# EAGLE board CT_schematic (EAGLE 7.6.0)

Size 100 x 80 mm. Coordinates in mm from the lower left corner, seen from the top.
Outline: 0,0 100,0 100,80 0,80 0,0
Copper layers (1*16): Top 0.035mm / dielectric 1.5mm / Bottom 0.035mm
Design rules "default": minimum track width 10mil, minimum drill 24mil, track to track 8mil, track to pad 8mil, pad to pad 8mil, via to via 8mil, smd to smd 8mil, copper to edge 40mil, drill to drill 8mil, minimum pad ring 10mil, minimum via ring 8mil, stop-mask expansion 4mil, vias tented up to drill 0mil, thermal gap 10mil

## Footprints (pad centres in the part's own frame; a part is rotated, then mirrored left to right if it is on the bottom)
C0603 = smd 0.8 x 0.8: 1 -0.762,0; 2 0.762,0
C0402 = smd 0.5 x 0.5: 1 -0.508,0; 2 0.508,0
C0805 = smd 1.2 x 1.3: 1 -1.016,0; 2 1.016,0
C1210 = smd 1.2 x 2.5: 1 -1.524,0; 2 1.524,0
EXV-9H = smd 3.505 x 1.676: 1 -2.857,0; 2 2.857,0
L0603 = smd 0.8 x 0.8: 1 -0.762,0; 2 0.762,0
L1210 = smd 1.2 x 2.5: 1 -1.524,0; 2 1.524,0
PJ-037B_PACKAGE = drill 3.7 square: 1 12,0 | drill 3.2 square: 2 6,0
R0603 = smd 0.8 x 0.8: 1 -0.762,0; 2 0.762,0
LQFP48 = smd 0.3 x 1.2: 1 -2.75,-4.25; 2 -2.25,-4.25; 3 -1.75,-4.25; 4 -1.25,-4.25; 5 -0.75,-4.25; 6 -0.25,-4.25; 7 0.25,-4.25; 8 0.75,-4.25; 9 1.25,-4.25; 10 1.75,-4.25; 11 2.25,-4.25; 12 2.75,-4.25; 25 2.75,4.25; 26 2.25,4.25; 27 1.75,4.25; 28 1.25,4.25; 29 0.75,4.25; 30 0.25,4.25; 31 -0.25,4.25; 32 -0.75,4.25; 33 -1.25,4.25; 34 -1.75,4.25; 35 -2.25,4.25; 36 -2.75,4.25 | smd 1.2 x 0.3: 13 4.25,-2.75; 14 4.25,-2.25; 15 4.25,-1.75; 16 4.25,-1.25; 17 4.25,-0.75; 18 4.25,-0.25; 19 4.25,0.25; 20 4.25,0.75; 21 4.25,1.25; 22 4.25,1.75; 23 4.25,2.25; 24 4.25,2.75; 37 -4.25,2.75; 38 -4.25,2.25; 39 -4.25,1.75; 40 -4.25,1.25; 41 -4.25,0.75; 42 -4.25,0.25; 43 -4.25,-0.25; 44 -4.25,-0.75; 45 -4.25,-1.25; 46 -4.25,-1.75; 47 -4.25,-2.25; 48 -4.25,-2.75
SSOP-20 = smd 1.651 x 0.432: 1 -3.48,2.925; 2 -3.48,2.275; 3 -3.48,1.625; 4 -3.48,0.975; 5 -3.48,0.325; 6 -3.48,-0.325; 7 -3.48,-0.975; 8 -3.48,-1.625; 9 -3.48,-2.275; 10 -3.48,-2.925; 11 3.48,-2.925; 12 3.48,-2.275; 13 3.48,-1.625; 14 3.48,-0.975; 15 3.48,-0.325; 16 3.48,0.325; 17 3.48,0.975; 18 3.48,1.625; 19 3.48,2.275; 20 3.48,2.925
182-009-MALE = drill 1.194 pad 1.524 octagon: 1 -5.537,10.923; 2 -2.769,10.923; 3 0,10.923; 4 2.769,10.923; 5 5.537,10.923; 6 -4.153,8.08; 7 -1.384,8.08; 8 1.384,8.08; 9 4.153,8.08 | hole 3.048: -12.446,9.501; 12.446,9.501
ABLS-25.000MHZ-B2F-T = smd 5.6 x 2.8: 1 -3.81,0; 2 5.69,0
ASEK = smd 1.4 x 1: 1 -1.1,-0.8; 2 1.1,-0.8; 3 1.1,0.8; 4 -1.1,0.8
SOIC-8_EP = smd 1.6 x 0.533: 1 -2.921,1.905; 2 -2.921,0.635; 3 -2.921,-0.635; 4 -2.921,-1.905; 5 2.921,-1.905; 6 2.921,-0.635; 7 2.921,0.635; 8 2.921,1.905 | smd 2.54 x 3.302: EPAD 0,0 | drill 0.406 pad 0.406: P$1 -0.508,0.635; P$2 0.381,0.635; P$3 -0.508,-0.635; P$4 0.381,-0.635
SON-6 = smd 0.55 x 0.3: 1 -0.355,0.5 | smd 0.52 x 0.3: 2 -0.37,0; 3 -0.37,-0.5; 4 0.37,-0.5; 5 0.37,0; 6 0.37,0.5
SW_4-1437565-2 = smd 1.4 x 2.1: 1 -2.23,4.55; 2 -2.23,-4.55; 3 2.23,4.55; 4 2.23,-4.55
LGM67K-G1J2-24-Z = smd 0.8 x 1.4: A -2,0; C 0,0
NC7SZ125M5X = smd 1.3 x 0.7: 1 -1.3,0.95; 2 -1.3,0; 3 -1.3,-0.95; 4 1.3,-0.95; 5 1.3,0.95

## Placement (x,y rotation side)
C1  1e-07  [C0603]  -48.26,58.42 0 top  (outside the outline)
C2  1e-07  [C0603]  -52.07,58.42 0 top  (outside the outline)
C3  1e-07  [C0603]  -55.88,58.42 0 top  (outside the outline)
C4  1e-07  [C0603]  -59.69,58.42 0 top  (outside the outline)
C5  4.7e-06  [C0603]  -44.45,58.42 0 top  (outside the outline)
C6  1e-08  [C0603]  -63.5,58.42 0 top  (outside the outline)
C7  1e-06  [C0603]  -15.24,63.5 0 top  (outside the outline)
C8  1e-11  [C0402]  -53.34,63.5 0 top  (outside the outline)
C9  1e-11  [C0402]  -57.15,63.5 0 top  (outside the outline)
C10  1e-06  [C0603]  -19.05,63.5 0 top  (outside the outline)
C11  1e-06  [C0603]  -22.86,63.5 0 top  (outside the outline)
C12  1e-06  [C0603]  -26.67,63.5 0 top  (outside the outline)
C13  4.7e-06  [C0805]  -40.64,52.07 0 top  (outside the outline)
C14  1e-08  [C0402]  -60.96,63.5 0 top  (outside the outline)
C15  1e-05  [C1210]  -58.42,45.72 0 top  (outside the outline)
C16  1e-05  [C1210]  -64.77,45.72 0 top  (outside the outline)
C17  1e-05  [C1210]  -16.51,52.07 0 top  (outside the outline)
C18  1e-05  [C1210]  -22.86,52.07 0 top  (outside the outline)
C19  1e-07  [C0402]  -64.77,63.5 0 top  (outside the outline)
C20  0.0001  [EXV-9H]  -38.1,38.1 0 top  (outside the outline)
C21  0.0001  [EXV-9H]  -49.53,38.1 0 top  (outside the outline)
C22  1e-08  [C0402]  -15.24,68.58 0 top  (outside the outline)
F1  240.0  [L0603]  -30.48,63.5 0 top  (outside the outline)
I1  1.5e-05  [L1210]  -29.21,52.07 0 top  (outside the outline)
J1  PJ-037B  [PJ-037B_PACKAGE]  -67.31,7.62 0 top  (outside the outline)
R1  10000.0  [R0603]  -25.4,58.42 0 top  (outside the outline)
R2  1000.0  [R0603]  -34.29,63.5 0 top  (outside the outline)
R3  1600.5  [R0603]  -38.1,63.5 0 top  (outside the outline)
R4  4700.0  [R0603]  -41.91,63.5 0 top  (outside the outline)
R5  10000.0  [R0603]  -30.48,58.42 0 top  (outside the outline)
R6  100000.0  [R0603]  -54.61,52.07 0 top  (outside the outline)
R7  100000.0  [R0603]  -59.69,52.07 0 top  (outside the outline)
R8  100000.0  [R0603]  -64.77,52.07 0 top  (outside the outline)
R9  4031.5447154472  [R0603]  -49.53,52.07 0 top  (outside the outline)
R10  2200.0  [R0603]  -45.72,63.5 0 top  (outside the outline)
R11  10000.0  [R0603]  -35.56,58.42 0 top  (outside the outline)
R12  10000.0  [R0603]  -40.64,58.42 0 top  (outside the outline)
R13  9100.0  [R0603]  -49.53,63.5 0 top  (outside the outline)
R14  680000.0  [R0603]  -15.24,58.42 0 top  (outside the outline)
R15  120000.0  [R0603]  -20.32,58.42 0 top  (outside the outline)
U1  STM32L031C6T7  [LQFP48]  -43.18,27.94 0 top  (outside the outline)
U2  MAX3218EAP+T  [SSOP-20]  -53.34,26.67 0 top  (outside the outline)
U3  182-009-113R531  [182-009-MALE]  -36.83,6.35 0 top  (outside the outline)
U4  ABLS-25.000MHZ-B2F-T  [ABLS-25.000MHZ-B2F-T]  -26.67,45.72 0 top  (outside the outline)
U5  ASEK-32.768KHz-ECST  [ASEK]  -29.21,38.1 0 top  (outside the outline)
U6  MIC5234YME  [SOIC-8_EP]  -38.1,44.45 0 top  (outside the outline)
U7  TPS3895ADRYR  [SON-6]  -17.78,67.31 0 top  (outside the outline)
U8  4-1437565-2  [SW_4-1437565-2]  -27.94,27.94 0 top  (outside the outline)
U9  Q65110A2395  [LGM67K-G1J2-24-Z]  -46.99,45.72 0 top  (outside the outline)
U10  nc7sz125m5x  [NC7SZ125M5X]  -34.29,52.07 0 top  (outside the outline)

## Library data of the parts
C1-C22 F1 I1 J1 R1-R15 U1-U10 = circuit_tree

## Nets
CLK_CRYSTAL_U1_5: C8.1 U1.5 U4.1
CLK_CRYSTAL_U1_6: C9.1 U1.6 U4.2
CLK_U1_3: U1.3 U5.3
GND: C1.2 C2.2 C3.2 C4.2 C5.2 C6.2 C7.2 C8.2 C9.2 C10.2 C11.2 C12.2 C14.2 C15.2 C16.2 C17.2 C18.2 C19.2 C20.2 C21.2 C22.2 J1.2 R2.2 R5.2 R10.2 R13.2 R15.2 U1.8 U1.23 U1.35 U1.47 U2.5 U2.17 U2.20 U3.5 U5.2 U6.7 U6.EPAD U7.2 U9.C U10.1 U10.3
NET_U1_7: R4.1 U1.7 U10.4
NET_U1_9: C6.1 C7.1 F1.1 U1.9
NET_U1_44: R5.1 U1.44
NET_U1_45: R3.1 U1.45 U9.A
NET_U1_46: R1.1 U1.46 U8.3 U8.4
NET_U2_1: I1.1 U2.1
NET_U2_2: R6.1 U2.2
NET_U2_3: R7.1 U2.3
NET_U2_4: R8.1 U2.4
NET_U2_15: C12.1 U2.15
NET_U2_16: C13.2 U2.16
NET_U2_18: C13.1 U2.18
NET_U2_19: C11.1 U2.19
NET_U3_2: U2.12 U3.2
NET_U3_3: U2.14 U3.3
NET_U3_7: U2.11 U3.7
NET_U3_8: U2.13 U3.8
NET_U6_4: R9.2 R10.1 U6.4
NET_U7_1: R12.1 R13.1 U7.1
NET_U7_3: R14.2 R15.1 U7.3
NET_U7_4: R11.1 U7.4 U10.2
NET_U8_1: R2.1 U8.1 U8.2
PROC_LPUART1_CTS: U1.16 U2.8
PROC_LPUART1_RTS: U1.19 U2.10
PROC_LPUART1_RX: U1.1 U2.9
PROC_LPUART1_TX: U1.12 U2.7
VCC_S1_10V9: C15.1 C16.1 C20.1 C21.1 J1.1 U6.5 U6.8
VCC_TIER1_3V3: C1.1 C2.1 C3.1 C4.1 C5.1 C10.1 C14.1 C17.1 C18.1 C19.1 C22.1 F1.2 I1.2 R1.2 R3.2 R4.2 R6.2 R7.2 R8.2 R9.1 R11.2 R12.2 R14.1 U1.24 U1.36 U1.48 U2.6 U5.4 U6.1 U7.6 U10.5

## Tracks (layer width: path | path; a pad name or v marks a point on that pad's centre or on a via)
CLK_CRYSTAL_U1_5  (2 unrouted)
CLK_CRYSTAL_U1_6  (2 unrouted)
CLK_U1_3  (1 unrouted)
GND  (41 unrouted)
NET_U1_7  (2 unrouted)
NET_U1_9  (3 unrouted)
NET_U1_44  (1 unrouted)
NET_U1_45  (2 unrouted)
NET_U1_46  (3 unrouted)
NET_U2_1  (1 unrouted)
NET_U2_2  (1 unrouted)
NET_U2_3  (1 unrouted)
NET_U2_4  (1 unrouted)
NET_U2_15  (1 unrouted)
NET_U2_16  (1 unrouted)
NET_U2_18  (1 unrouted)
NET_U2_19  (1 unrouted)
NET_U3_2  (1 unrouted)
NET_U3_3  (1 unrouted)
NET_U3_7  (1 unrouted)
NET_U3_8  (1 unrouted)
NET_U6_4  (2 unrouted)
NET_U7_1  (2 unrouted)
NET_U7_3  (2 unrouted)
NET_U7_4  (2 unrouted)
NET_U8_1  (2 unrouted)
PROC_LPUART1_CTS  (1 unrouted)
PROC_LPUART1_RTS  (1 unrouted)
PROC_LPUART1_RX  (1 unrouted)
PROC_LPUART1_TX  (1 unrouted)
VCC_S1_10V9  (6 unrouted)
VCC_TIER1_3V3  (30 unrouted)